# Altium PCB Main.PcbDoc
Units mm, origin at the board's own origin, x right, y up, seen from the top; angles counter-clockwise.
Board outline 56.61 x 57.66 mm, 2 copper layers (Top Layer, Bottom Layer); 33 components, 26 nets, 162 pads, 25 vias.
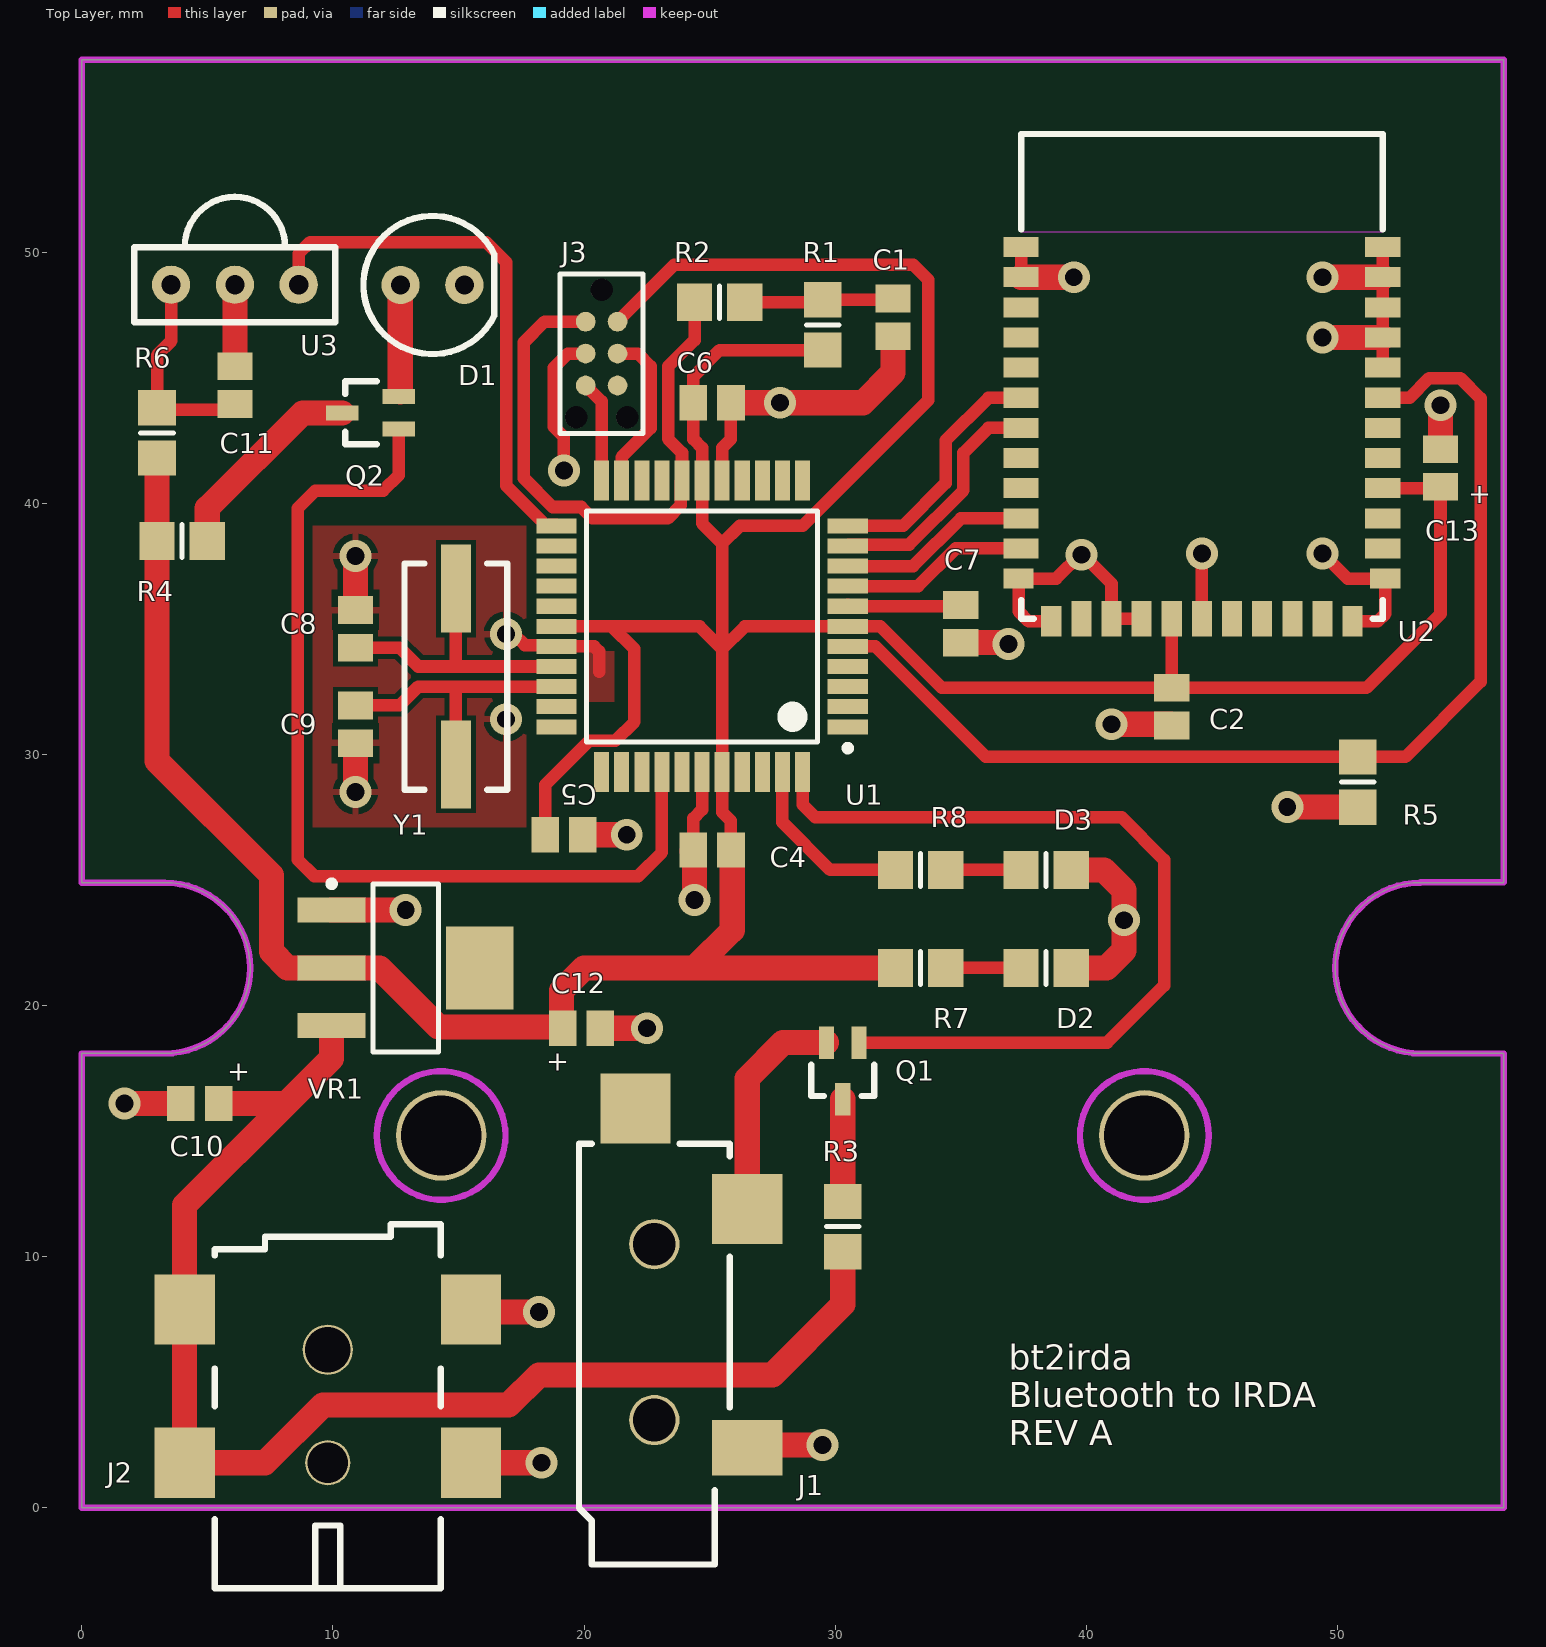
[diagram p0: Top Layer view]
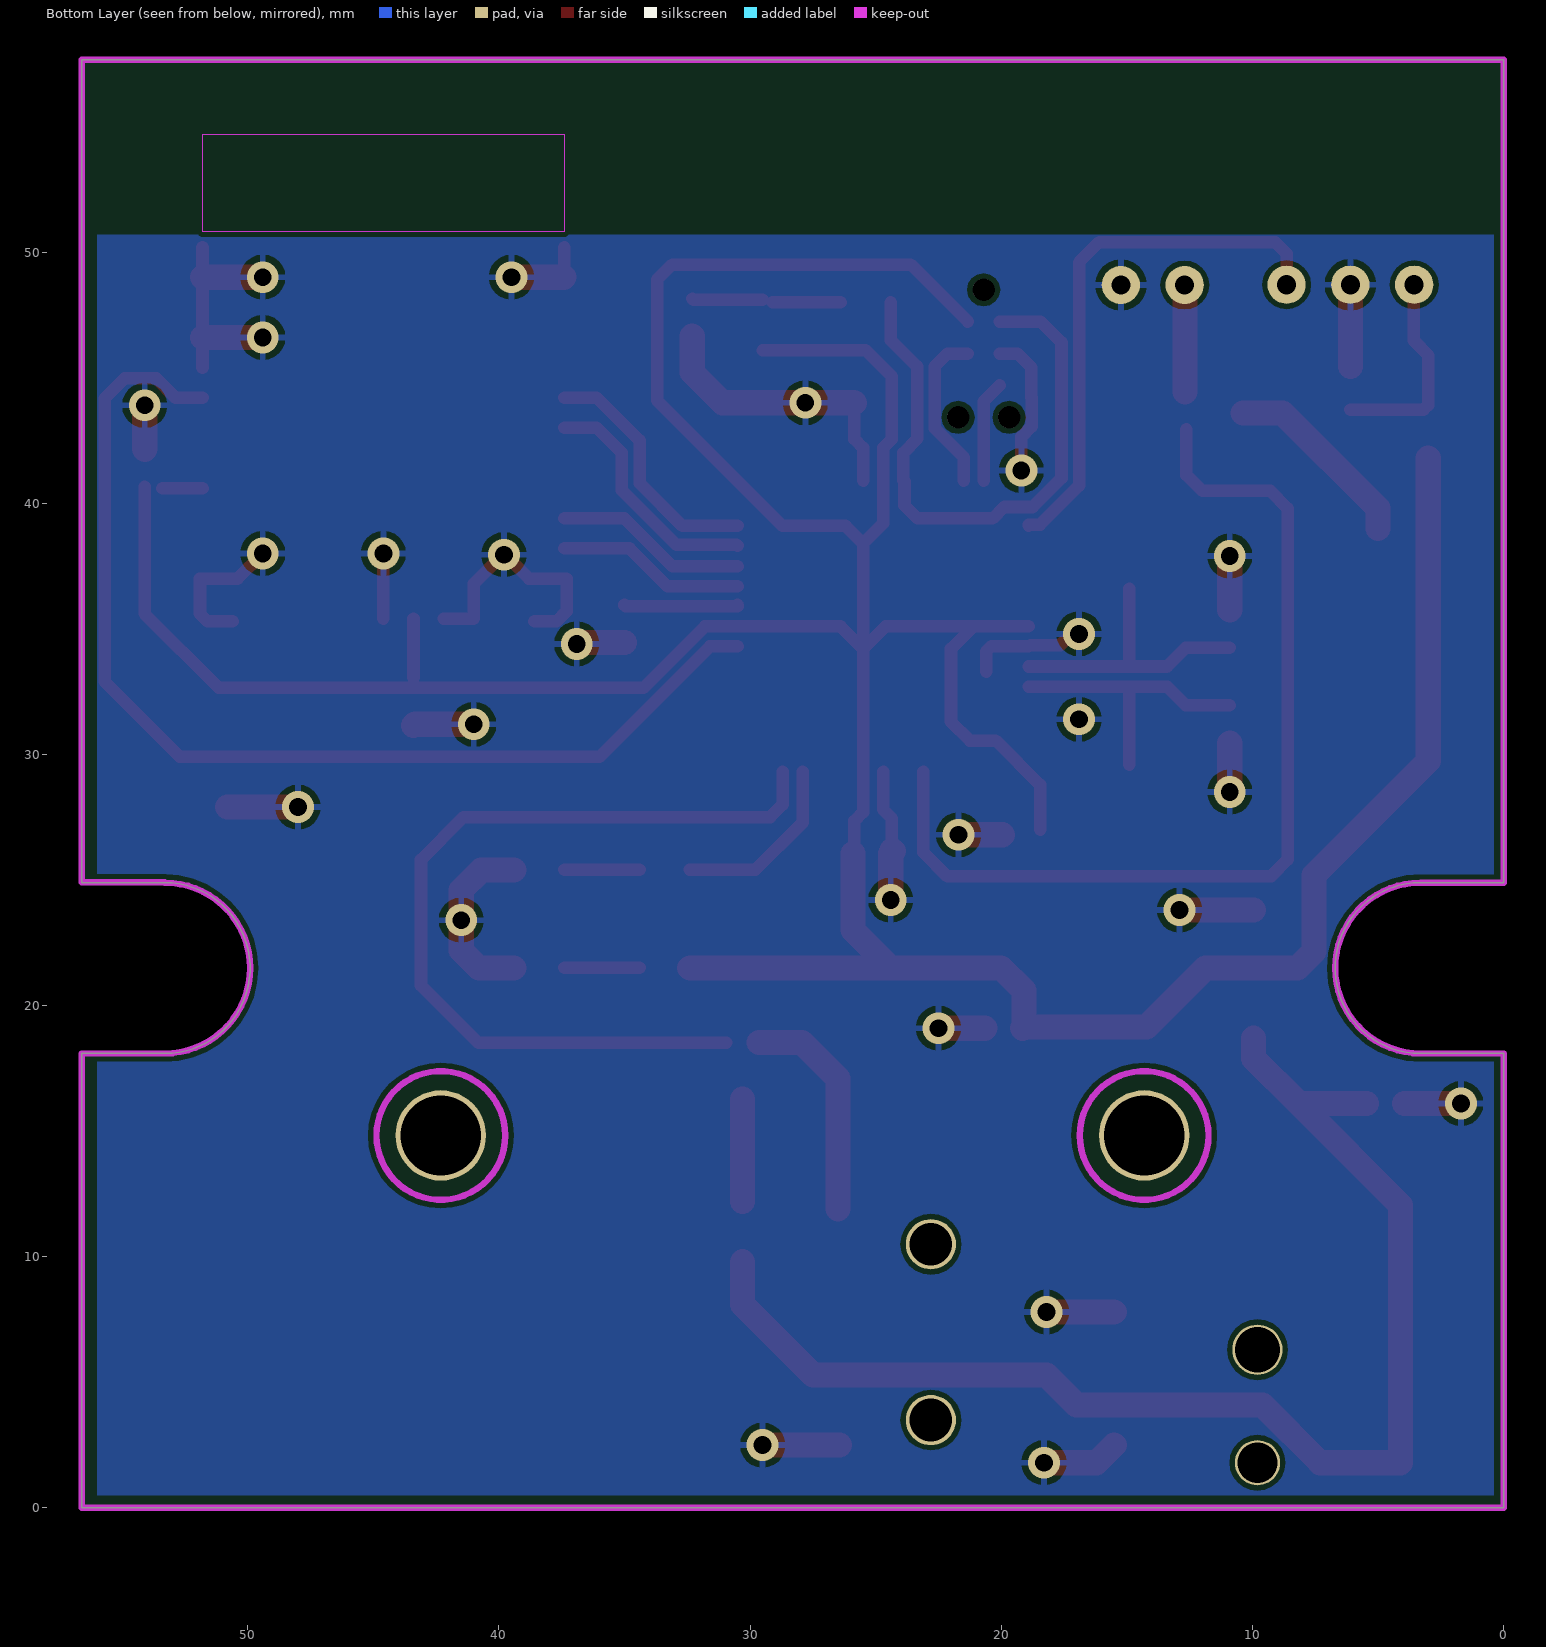
[diagram p1: Bottom Layer view, seen from below]

## Layer stack, top to bottom
Top Solder: solder mask 0.0102, Solder Resist, Dk 3.5
Top Layer: signal copper 0.0356
Dielectric 1: dielectric 0.32, FR-4, Dk 4.8
Bottom Layer: signal copper 0.0356
Bottom Solder: solder mask 0.0102, Solder Resist, Dk 3.5

## Board outline
0,0 0,18.095 3.305,18.095 ccw(c3.305,21.495) 3.305,24.895 0,24.895 0,57.66 56.61,57.66 56.61,24.91 56.595,24.895 53.305,24.895 ccw(c53.305,21.495) 53.305,18.095 56.605,18.095 56.61,18.09 56.61,0

## Design rules (kind name [scope] priority, off if disabled: settings)
Clearance [All] p1: gap=0.2
PolygonConnect [All] p1: connectstyle=Relief reliefconductorwidth=0.254 reliefentries=4 polygonreliefangle="90 Angle" airgapwidth=0.254
RoutingVias [All] p1: holewidth=0.711 width=1.27 viastyle="Through Hole" minholewidth=0.711 minwidth=1.27 maxholewidth=0.711 maxwidth=1.27
SolderMaskExpansion [All] p1: expansion=0.102
Width Width_Power [InNetClass('Power')] p1: maxlimit=1 minlimit=0.5 preferedwidth=1 minimp=50.000000 maximp=50.000000 favimp=50.000000
Width [All] p2: maxlimit=0.5 minlimit=0.254 preferedwidth=0.5 minimp=50.000000 maximp=50.000000 favimp=50.000000
30 further rules are at their usual default settings.

## Classes and differential pairs
net class Power: 3.3V 12V GND NetD1_1 NetJ1_1 NetQ1_1 NetQ2_1

## Components (designator, comment, footprint, x,y, rotation, side; value= is the part's Value field where it differs from the comment)
C1 "C0805C104K8RACTU" C0805 32.3,47.4 r90 top
C2 "C0805C104K8RACTU" C0805 43.4,31.9 r90 top
C4 "C0805C104K8RACTU" C0805 25.1,26.2 r0 top
C5 "C0805C104K8RACTU" C0805 19.2,26.8 r180 top
C6 "C0805C104K8RACTU" C0805 25.1,44 r180 top
C7 "C0805C106K4PACTU" C0805 35,35.2 r270 top
C8 "C0805C390J5GACTU" C0805 10.9,35 r90 top
C9 "C0805C390J5GACTU" C0805 10.9,31.2 r270 top
C10 "C0805C106K4PACTU" C0805 4.7,16.1 r180 top
C11 "C0805C105K8RACTU" C0805 6.1,44.7 r270 top
C12 "C2012X5R1C226K125AC" C0805 19.9,19.1 r0 top
C13 "C0805C106K4PACTU" C0805 54.1,41.4 r90 top
D1 "TSUS5202" RADIAL-2.54 13.966,48.69 r0 top
D2 "LTST-C171KRKT" 6-0805_M 38.4,21.5 r0 top
D3 "LTST-C171GKT" 6-0805_M 38.4,25.4 r0 top
J1 "MJ-3523-SMT" MJ-3523 22.8,7 r270 top
J2 "PJ-002AH-SMT" PJ-002AH-SMT 9.8,1.8 r90 top
J3 "ICSP" TC2030-MCP-NL 20.7,48.5 r270 top
Q1 "AO7404" SOT323-M 30.3,17.4 r180 top
Q2 "AO7404" SOT323-M 11.5,43.6 r90 top
R1 "RC0805FR-0710KP" 6-0805_M 29.5,47.1 r270 top
R2 "RC0805JR-07100RP" 6-0805_M 25.4,48 r180 top
R3 "DNP" 6-0805_M 30.3,11.2 r270 top
R4 "RC0805JR-0722RL" 6-0805_M 4,38.5 r180 top
R5 "RC0805FR-07100KL" 6-0805_M 50.8,28.9 r270 top
R6 "RC0805JR-07330RL" 6-0805_M 3,42.8 r90 top
R7 "RC0805JR-0768RL" 6-0805_M 33.4,21.5 r180 top
R8 "RC0805JR-0768RL" 6-0805_M 33.4,25.4 r180 top
U1 "PIC24FJ64GA204" QFN44_PIC 24.7,35.1 r180 top
U2 "BC118" BC118 37.4,35.4 r0 top
U3 "TSOP38338" TSOP 6.1,48.7 r180 top
VR1 "AZ1117CH-3.3TRG1" SOT223_M 12.9,21.5 r0 top
Y1 "ECS-80-20-5PVX" HC49/US 14.9,33.1 r90 top

## Footprints (in the part's own frame and the unit in brackets; to place one, negate y for a bottom-side part, rotate by r counter-clockwise, add the part's x,y. Pads: shape width x height; smd on the part's side, far side on the other; paste and mask are expansions set on the pad)
6-0805_M [mm] "Chip Resistor, Body 2.0x1.2mm, IPC Low Density"
  rect 1.4x1.5 smd: 1(-1,0) 2(1,0)
  silkscreen extent 0,-0.65 0,0.65, body extent -1.07,-0.7 1.07,0.7, height 0.7
BC118 [mm] "BC118 Bluetooth 4 BLE Module"
  rect 1.4x0.8 smd mask+0.1: 1(0,14.8) 2(0,13.6) 3(0,12.4) 4(0,11.2) 5(0,10) 6(0,8.8) 7(0,7.6) 8(0,6.4) 9(0,5.2) 10(0,4) 11(0,2.8) 25(14.4,2.8) 26(14.4,4) 27(14.4,5.2) 28(14.4,6.4) 29(14.4,7.6) 30(14.4,8.8) 31(14.4,10) 32(14.4,11.2) 33(14.4,12.4) 34(14.4,13.6) 35(14.4,14.8)
  rect 1.2x0.8 smd mask+0.1: 12(-0.1,1.6) 24(14.5,1.6)
  rect 0.8x1.2 smd mask+0.1: 13(1.2,-0.1) 23(13.2,-0.1)
  rect 0.8x1.4 smd mask+0.1: 14(2.4,0) 15(3.6,0) 16(4.8,0) 17(6,0) 18(7.2,0) 19(8.4,0) 20(9.6,0) 21(10.8,0) 22(12,0)
  Keep-Out Layer region: 0,15.4 14.4,15.4 14.4,19.3 0,19.3
  silkscreen extent 0,0 14.4,19.3, body extent 0,0 14.4,19.3, height 2.8
C0805 [mm] "Chip Capacitor, Body 2.0x1.3mm, IPC High Density"
  rect 1.1x1.4 smd: 1(-0.75,0) 2(0.75,0)
  body extent -1.1,-0.72 1.1,0.72, height 1.4
HC49/US [mm] "HC49/US"
  rect 3.5x1.2 smd: 1(-3.5,0) 2(3.5,0)
  silkscreen extent -4.5,-2.05 4.5,2.05, body extent -4.5,-2 4.5,2, height 2.3
MJ-3523 [mm] "Jack mono"
  rect 2.2x2.8 smd: 1(4.6,3.7)
  rect 2.8x2.8 smd: 2(-4.9,3.7) 10(-8.9,-0.75)
  round 2 hole 1.7 paste+0 mask+0: ""(-3.5,0) ""(3.5,0)
  silkscreen extent -7.5,-3 9.25,3, body extent -9.5,-3 9.5,4.5, height 5
PJ-002AH-SMT [mm] "PJ-002AH-SMT"
  rect 2.8x2.4 smd: 1(0,5.7) 1(6.1,5.7) 2(0,-5.7) 3(6.1,-5.7)
  round 1.8 hole 1.6 paste+0 mask+0: ""(0,0)
  round 2 hole 1.8 paste+0 mask+0: ""(4.5,0)
  silkscreen extent -5,-4.5 9.5,4.5, body extent -4.9,-6.25 9.9,6.35, height 11
QFN44_PIC [mm] "TQFP, 44-Leads, Body 10.00x10.00mm, Pitch 0.80mm, IPC Low Density"
  rect 1.6x0.6 smd: 1(-5.8,4) 2(-5.8,3.2) 3(-5.8,2.4) 4(-5.8,1.6) 5(-5.8,0.8) 6(-5.8,0) 7(-5.8,-0.8) 8(-5.8,-1.6) 9(-5.8,-2.4) 10(-5.8,-3.2) 11(-5.8,-4) 23(5.8,-4) 24(5.8,-3.2) 25(5.8,-2.4) 26(5.8,-1.6) 27(5.8,-0.8) 28(5.8,0) 29(5.8,0.8) 30(5.8,1.6) 31(5.8,2.4) 32(5.8,3.2) 33(5.8,4)
  rect 0.6x1.6 smd: 12(-4,-5.8) 13(-3.2,-5.8) 14(-2.4,-5.8) 15(-1.6,-5.8) 16(-0.8,-5.8) 17(0,-5.8) 18(0.8,-5.8) 19(1.6,-5.8) 20(2.4,-5.8) 21(3.2,-5.8) 22(4,-5.8) 34(4,5.8) 35(3.2,5.8) 36(2.4,5.8) 37(1.6,5.8) 38(0.8,5.8) 39(0,5.8) 40(-0.8,5.8) 41(-1.6,5.8) 42(-2.4,5.8) 43(-3.2,5.8) 44(-4,5.8)
  silkscreen extent -5.93,-4.6 4.6,4.97, body extent -5,-5 5,5, height 1.2
RADIAL-2.54 [mil]
  round 60 hole 30: 1(-50,0) 2(50,0)
  silkscreen extent -108,-108 97,108
SOT223_M [mm] "SOT223, 4-Leads, Body 6.5x3.5mm, Pitch 2.3mm, Lead Span 7mm, IPC Low Density"
  rect 2.7x1 smd: 1(-2.95,2.3) 2(-2.95,0) 3(-2.95,-2.3)
  rect 2.7x3.3 smd: 4(2.95,0)
  silkscreen extent -3.07,-3.35 1.3,3.47, body extent -1.85,-3.35 1.85,3.35, height 1.7
SOT323-M [mm] "SOT323 (SC70, SOT-323), Low density"
  rect 0.6x1.3 smd: 1(0,1.125) 2(-0.65,-1.125) 3(0.65,-1.125)
  silkscreen extent -1.25,-0.25 1.25,1, body extent -1,-0.62 1,0.63, height 0.9
TC2030-MCP-NL [mil]
  round 31 smd: 1(50,-25) 2(50,25) 3(100,-25) 4(100,25) 5(150,-25) 6(150,25)
  round 34 hole 35 unplated: A(0,0) B(200,40) C(200,-40)
  silkscreen extent -25,-65 225,65
TSOP [mil] "TSOP IR RECEIVER"
  round 60 hole 30: 1(-100,0) 2(0,0) 3(100,0)
  silkscreen extent -157,-138 157,59, body extent -98,-59 98,59, height 274

## Part data
C1 C2 C4 C5 C6: library part "Cap Semi", "CAP CER 0.1UF 10V 10% X7R 0805"
C7 C10 C13: library part "Cap Pol3", "CAP CER 10UF 16V 10% X5R 0805"
C8 C9: library part "Cap Semi", "CAP CER 39PF 50V 5% NP0 0805"
C11: library part "Cap Semi", "CAP CER 1UF 10V 10% X7R 080"
C12: library part "Cap Pol3", "CAP CER 22UF 16V 10% X5R 0805"
D1: library part LED0, "EMITTER IR 950NM 150MA RADIAL"
D2: library part LED2, "LED RED CLEAR THIN 0805 SMD"
D3: library part LED2, "LED GREEN CLEAR THIN 0805 SMD"
J1: library part "Phonejack2 TN", "CONN AUDIO JACK MONO 3.5MM SMD"
J2: "Low Voltage Power Supply Connector"
Q1 Q2: library part MOSFET-N, "N-Channel MOSFET"
R1: library part Res1, "RES SMD 10K OHM 5% 1/8W 0805"
R2: library part Res1, "RES SMD 100 OHM 5% 1/8W 0805"
R3: library part Res1
R4: library part Res1, "RES SMD 22 OHM 5% 1/8W 0805"
R5: library part Res1, "RES SMD 100K OHM 1% 1/8W 0805"
R6: library part Res1, "RES SMD 330 OHM 5% 1/8W 0805"
R7 R8: library part Res1, "RES SMD 68 OHM 5% 1/8W 0805"
U1: "PIC24F 64KB flash, 44QFN MCU"
U2: "BC118 Bluetooth 4.0 Module"
U3: "IC IR RCVR MOD 38KHZ DOME RADIAL"
VR1: library part "Volt Reg", "IC REG LDO 3.3V 0.8A SOT223"
Y1: library part XTAL, "CRYSTAL 8.0000MHZ 20PF SMD"

## Free pads (board coordinates)
  round 3.6 hole 3.2 paste+0 mask+0: M(14.31,14.83) M(42.31,14.83)

## Via types
v1: diameter 1.27, hole 0.711, Top Layer to Bottom Layer, 25 vias

## Nets (pads, with @x,y where several pads share a name; then routed paths per layer and width w, separated by ;. In a path a pad name is that pad's centre, name@x,y a point inside that pad or via, vN(x,y) a via of type N, cw(c..) or ccw(c..) an arc to the next point about the centre after c; other vN are vias at no path point)
3.3V: C2.2 C4.2 C5.2 C6.2 C12.1 C13.1 J3.2 R1.2 R4.2 R6.1 R7.2 U1.6 U1.17 U1.28 U1.40 U2.17 U2.27 VR1.2 | length 166.4
  Top Layer w0.5: C5.2@18.45,27 18.45,28.786 20.214,30.55 21.25,30.55 22,31.3 22,34.2 21.1,35.1 ; U1.28 21.1,35.1 ; J3.2@21.33,47.23 23.6,49.5 33.1,49.5 33.7,48.9 33.7,44.1 28.7,39.1 26.2,39.1 25.5,38.4 ; C4.2 25.85,27.35 25.5,27.7 U1.40 25.5,34.2 ; R1.2 25.4,46.1 24.35,45.05 C6.2 24.35,42.55 24.7,42.2 U1.17 24.7,39.2 25.5,38.4 ; C2.2@43.4,33.05 U2.17 ; U2.27 C13.1@53.4,40.6 ; C13.1 54.1,35.6 51.15,32.65 C2.2 34.25,32.65 31.8,35.1 U1.6 26.4,35.1 25.5,34.2 ; 21.1,35.1 24.6,35.1 25.5,34.2 ; 25.5,34.2 25.5,38.4
  Top Layer w1: R6.1 3,29.744 7.552,25.191 7.552,22.148 8.2,21.5 VR1.2 11.86,21.5 14.21,19.15 C12.1@19.1,19.15 ; C12.1 C12.1@19.1,19.15 ; C4.2@25.9,26.05 25.9,23 24.4,21.5 ; R7.2 24.4,21.5 ; C12.1@19.1,19.15 19.1,20.6 20,21.5 24.4,21.5
12V: C10.1 J2.1 R3.2 VR1.3 | length 52.5
  Top Layer w1: C10.1 8.15,16.1 ; 9.95,18.7 9.95,17.9 8.15,16.1 ; R3.2@30.3,9.8 30.3,8.1 27.5,5.3 18.2,5.3 17,4.1 9.6,4.1 7.3,1.8 4.1,1.8 4.1,12.05 8.15,16.1
BT_CTS: U1.9 U2.10 | length 7.7
  Top Layer w0.5: U1.9 33.1,37.5 35,39.4 U2.10
BT_RTS: U1.8 U2.11 | length 7.5
  Top Layer w0.5: U1.8 33.3,36.7 34.8,38.2 U2.11
BT_RX: U1.11 U2.6 | length 10
  Top Layer w0.5: U1.11 32.7,39.1 34.4,40.8 34.4,42.5 36.1,44.2 U2.6
BT_TX: U1.10 U2.7 | length 9.7
  Top Layer w0.5: U1.10 30.55,38.35 32.94,38.35 35.1,40.51 35.1,42 36.1,43 U2.7@37.4,43
BT_WAKE: R5.1 U1.5 U2.30 | length 44.1
  Top Layer w0.5: U1.5 31.6,34.3 36,29.9 52.7,29.9 55.7,32.9 55.7,44.17 54.885,44.985 53.651,44.985 52.866,44.2 U2.30
GND: C1.1 C2.1 C4.1 C5.1 C6.1 C7.2 C8.2 C9.2 C10.2 C11.1 C12.2 C13.2 D1.2 D2.2 D3.2 J1.1 J2.2 J2.3 J3.3 R5.2 U1.16 U1.29 U1.39 U2.1 U2.2 U2.12 U2.13 U2.15 U2.16 U2.18 U2.23 U2.24 U2.31 U2.32 U2.33 U2.34 U2.35 U3.2 VR1.1 | length 99.9
  Top Layer w0.5: v1(16.9,34.8) 17.2,34.8 17.65,34.35 18.85,34.35 U1.29 20.4,34.3 20.6,34.1 20.6,33.3 ; v1(19.2,41.3) 19.2,42.639 18.79,43.049 18.79,44.201 18.8,44.212 18.8,45.4 19.36,45.96 J3.3 ; C4.1 24.35,27.45 24.7,27.8 U1.39 ; U1.16 25.5,42.2 25.85,42.55 C6.1 ; U2.2 U2.1 ; U2.13 37.7,35.3 37.3,35.7 U2.12 38.8,37 39.8,38 41,36.8 U2.15 U2.16 ; U2.18 v1(44.6,38) ; v1(49.4,38) 50.4,37 U2.24 51.9,35.6 51.6,35.3 U2.23 ; U2.31 U2.32 U2.33 U2.34 U2.35
  Top Layer w1: v1(1.7,16.1) C10.2 ; C11.1 U3.2 ; VR1.1 v1(12.9,23.8) ; v1(10.9,28.5) C9.2 ; C8.2 v1(10.9,37.9) ; D1.2@15.2,48.654 D1.2 ; J2.2@15.5,2.5 16.2,1.8 v1(18.3,1.8) ; J2.3@15.5,7.8 v1(18.2,7.8) ; C5.1 v1(21.7,26.8) ; C12.2 v1(22.5,19.1) ; C4.1 24.3,26.15 24.4,26.05 v1(24.4,24.2) ; C6.1 v1(27.8,44) 31.1,44 32.3,45.2 C1.1 ; J1.1@26.436,2.506 26.442,2.5 v1(29.5,2.5) ; C7.2 v1@36.9,34.45 ; U2.2 v1(39.5,49) ; D2.2 40.8,21.5 41.5,22.2 41.5,24.6 40.7,25.4 D3.2 ; v1(41,31.2) 43.35,31.2 C2.1 ; v1(48,27.9) R5.2 ; v1(49.4,46.6) U2.32 ; v1(49.4,49) U2.34 ; C13.2 v1(54.1,43.9)
  other v1: 41.5,23.4 16.9,31.4 36.9,34.4 39.8,37.95
IR_EXT: Q1.2 U1.44 | length 34.7
  Top Layer w0.5: U1.44 28.7,28 29.2,27.5 41.4,27.5 43.1,25.8 43.1,20.8 40.825,18.525 Q1.2
IR_IN: U1.23 U3.1 | length 21.6
  Top Layer w0.5: U3.1 8.64,49.94 9.1,50.4 16.1,50.4 16.9,49.6 16.9,40.7 18.45,39.15 18.9,39.15 U1.23
IR_OUT: Q2.2 U1.37 | length 38.8
  Top Layer w0.5: Q2.2 12.625,41.125 12,40.5 9.3,40.5 8.6,39.8 8.6,25.81 9.26,25.15 22.15,25.15 23.1,26.1 U1.37
LED_STATUS: R8.2 U1.43 | length 7.3
  Top Layer w0.5: U1.43 27.9,27.3 29.8,25.4 R8.2
MCLR: J3.1 R2.2 U1.18 | length 24.1
  Top Layer w0.5: J3.1 18.43,47.23 17.6,46.4 17.6,41 18.75,39.85 19.886,39.85 20.336,39.4 23.336,39.4 23.85,39.914 23.85,40.85 U1.18 23.9,42.01 23.35,42.56 23.35,45.45 24.4,46.5 R2.2
NetC1_2: C1.2 R1.1 R2.1 | length 5.5
  Top Layer w0.5: R2.1 R1.1@29.1,48 ; R1.1 32.25,48.1 C1.2
NetC7_1: C7.1 U1.7 | length 4.6
  Top Layer w0.5: U1.7@30.5,35.95 U1.7 34.95,35.9 C7.1
NetC11_2: C11.2 R6.2 U3.3 | length 8.2
  Top Layer w0.5: U3.3@3.57,48.69 3.57,46.47 3,45.9 3,43.91 3.185,43.725 C11.2@6.11,43.725
NetD1_1: D1.1 Q2.3 | length 4.3
  Top Layer w0.5: D1.1@12.681,48.675 D1.1
  Top Layer w1: Q2.3@12.681,44.425 D1.1@12.681,48.675
NetD2_1: D2.1 R7.1 | length 3
  Top Layer w0.5: R7.1 D2.1
NetD3_1: D3.1 R8.1 | length 3
  Top Layer w0.5: R8.1 D3.1
NetJ1_1: J1.2 Q1.3 | length 8.9
  Top Layer w1: J1.2 26.5,17.1 27.925,18.525 Q1.3
NetQ1_1: Q1.1 R3.1 | length 4.1
  Top Layer w1: R3.1 Q1.1
NetQ2_1: Q2.1 R4.1 | length 7.7
  Top Layer w1: R4.1@5,39 5,39.8 8.8,43.6 Q2.1
OSCI: C8.1 U1.30 Y1.2 | length 11.4
  Top Layer w0.5: C8.1 12.65,34.25 13.4,33.5 14.9,33.5 ; Y1.2 14.9,33.5 ; U1.30 14.9,33.5
OSCO: C9.1 U1.31 Y1.1 | length 11.4
  Top Layer w0.5: C9.1 12.65,31.95 13.4,32.7 14.9,32.7 ; Y1.1 14.9,32.7 ; U1.31 14.9,32.7
PGC: J3.5 U1.22 | length 4.1
  Top Layer w0.5: J3.5 20.7,44.055 U1.22
PGD: J3.4 U1.21 | length 6.6
  Top Layer w0.5: J3.4 22.14,45.96 22.65,45.45 22.65,42.989 21.5,41.839 U1.21
pads on no net: J1. J1.10 J2. J3.6 J3.A J3.B J3.C U1.1 U1.2 U1.3 U1.4 U1.12 U1.13 U1.14 U1.15 U1.19 U1.20 U1.24 U1.25 U1.26 U1.27 U1.32 U1.33 U1.34 U1.35 U1.36 U1.38 U1.41 U1.42 U2.3 U2.4 U2.5 U2.8 U2.9 U2.14 U2.19 U2.20 U2.21 U2.22 U2.25 U2.26 U2.28 U2.29 VR1.4

## Polygon pours and split planes (outlines as drawn)
GND on Top Layer "Top Layer-No Net" (solid, pour order 0): 17.7,27.1 9.2,27.1 9.2,39.1 17.7,39.1
GND on Top Layer "Top Layer-No Net" (solid, pour order 2): 20,32.1 21.2,32.1 21.2,34.1 20,34.1
GND on Bottom Layer "Top Layer-No Net" (solid, remove dead copper, pour order 6): 0.4,0.5 56,0.5 56,50.7 0.4,50.7

## Keep-outs
Keep-Out Layer:
  circle w0.254: c42.31,14.83 r2.562
  circle w0.254: c14.31,14.83 r2.562
  lines w0.254: 53.305,24.895 ccw(c53.305,21.495) 53.305,18.095 56.605,18.095 56.61,18.09 56.61,0 0,0 0,18.095 3.305,18.095 ccw(c3.305,21.495) 3.305,24.895 0,24.895 0,57.66 56.61,57.66 56.61,24.91 53.305,24.91

## Silkscreen, mask and mechanical layers (free items; w line width, h text height)
Top Overlay:
  text "+" at 55.2,40 h0.8
  text "+" at 18.5,17.4 h0.8
  text "+" at 5.8,17 h0.8
  text "bt2irda / Bluetooth to IRDA / REV A" at 36.9,2.5 h1
Mechanical 1:
  lines w0.254: 53.305,24.895 ccw(c53.305,21.495) 53.305,18.095 56.605,18.095 56.61,18.09 56.61,0 0,0 0,18.095 3.305,18.095 ccw(c3.305,21.495) 3.305,24.895 0,24.895 0,57.66 56.61,57.66 56.61,24.91 53.305,24.91
Drill Drawing:
  text ".Legend" at -1.2,59.9 h1.52